# Altium PCB stop_sign.PcbDoc (part 2 of 2)
Units mm, origin at the board's own origin, x right, y up, seen from the top; angles counter-clockwise.
Board outline 187.78 x 187.78 mm, 2 copper layers (Top Layer, Bottom Layer); 123 components, 124 nets, 550 pads, 94 vias.
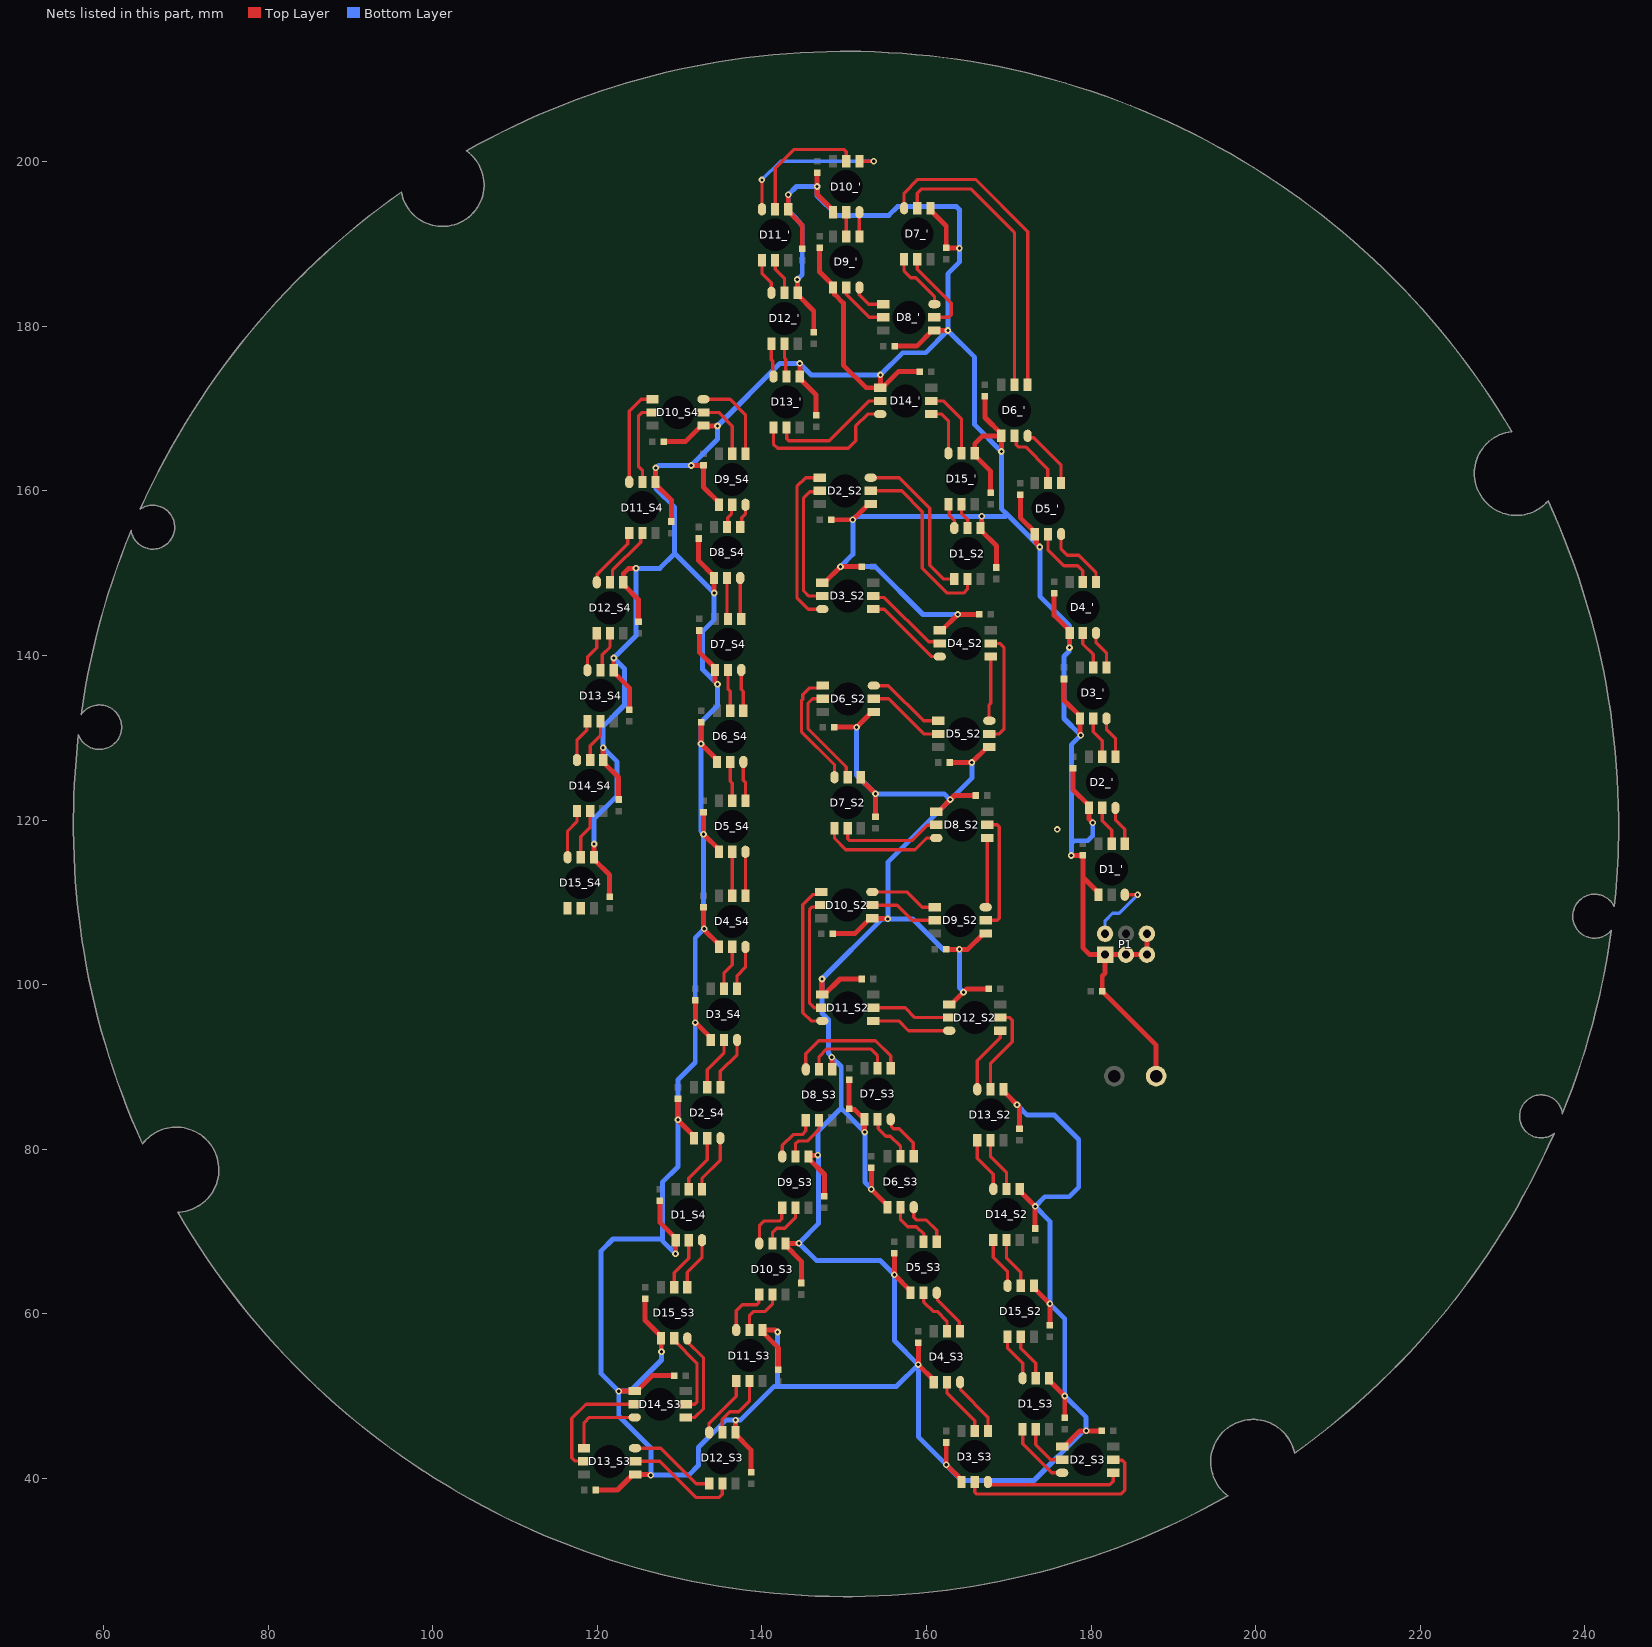
[diagram p2: the nets of this part, all layers, seen from the top]

## Via types
v1: diameter 0.8, hole 0.4, Top Layer to Bottom Layer, 94 vias

## Nets (pads, with @x,y where several pads share a name; then routed paths per layer and width w, separated by ;. In a path a pad name is that pad's centre, name@x,y a point inside that pad or via, vN(x,y) a via of type N, cw(c..) or ccw(c..) an arc to the next point about the centre after c; other vN are vias at no path point) (continued)
GND: C1_'.0 C1_S2.0 C1_S3.0 C1_S4.0 C2_'.0 C2_S2.0 C2_S3.0 C2_S4.0 C3_'.0 C3_S2.0 C3_S3.0 C3_S4.0 C4_'.0 C4_S2.0 C4_S3.0 C4_S4.0 C5_'.0 C5_S2.0 C5_S3.0 C5_S4.0 C6_'.0 C6_S2.0 C6_S3.0 C6_S4.0 C7_'.0 C7_S2.0 C7_S3.0 C7_S4.0 C8_'.0 C8_S2.0 C8_S3.0 C8_S4.0 C9_'.0 C9_S2.0 C9_S3.0 C9_S4.0 C10_'.0 C10_S2.0 C10_S3.0 C10_S4.0 C11_'.0 C11_S2.0 C11_S3.0 C11_S4.0 C12_'.0 C12_S2.0 C12_S3.0 C12_S4.0 C13_'.0 C13_S2.0 C13_S3.0 C13_S4.0 C14_'.0 C14_S2.0 C14_S3.0 C14_S4.0 C15_'.0 C15_S2.0 C15_S3.0 C15_S4.0 C16.0 D1_'.3 D1_S2.3 D1_S3.3 D1_S4.3 D2_'.3 D2_S2.3 D2_S3.3 D2_S4.3 D3_'.3 D3_S2.3 D3_S3.3 D3_S4.3 D4_'.3 D4_S2.3 D4_S3.3 D4_S4.3 D5_'.3 D5_S2.3 D5_S3.3 D5_S4.3 D6_'.3 D6_S2.3 D6_S3.3 D6_S4.3 D7_'.3 D7_S2.3 D7_S3.3 D7_S4.3 D8_'.3 D8_S2.3 D8_S3.3 D8_S4.3 D9_'.3 D9_S2.3 D9_S3.3 D9_S4.3 D10_'.3 D10_S2.3 D10_S3.3 D10_S4.3 D11_'.3 D11_S2.3 D11_S3.3 D11_S4.3 D12_'.3 D12_S2.3 D12_S3.3 D12_S4.3 D13_'.3 D13_S2.3 D13_S3.3 D13_S4.3 D14_'.3 D14_S2.3 D14_S3.3 D14_S4.3 D15_'.3 D15_S2.3 D15_S3.3 D15_S4.3 J1.1 P1.1 P1.2 P1.3 P1.4 | length 1125.2
  Top Layer w0.6: v1(119.6,117.1) 119.591,117.091 119.591,115.504 D15_S4.3@119.583,115.495 119.583,115.245 121.498,113.331 C13_S4.0@121.498,110.695 ; C11_S2.0@119.787,38.602 122.451,38.602 124.337,40.488 D13_S3.3@124.587,40.488 126.358,40.488 126.446,40.4 v1(126.5,40.4) ; v1(120.7,128.8) 120.713,128.787 120.713,127.319 D14_S4.3@120.726,127.306 120.726,127.056 122.598,125.185 C14_S4.0@122.598,122.506 ; v1(122,139.7) 121.998,139.698 121.998,138.23 D13_S4.3@121.996,138.228 121.996,137.978 123.898,136.077 C15_S4.0@123.898,133.428 ; v1(122.6,50.6) 122.611,50.611 124.524,50.611 D14_S3.3@124.535,50.622 124.785,50.622 126.66,52.497 C14_'.0@129.335,52.497 ; v1(124.7,150.6) 124.662,150.562 123.762,150.562 123.2,150 123.2,148.957 D12_S4.3@123.139,148.896 123.139,148.646 124.997,146.788 C2_S3.0@124.997,144.096 ; C13_S3.0@125.8,61.823 125.8,59.21 127.737,57.273 D15_S3.3@127.737,57.023 127.769,56.992 127.769,55.431 v1(127.8,55.4) ; v1(127.1,162.8) 127.088,162.788 127.088,161.1 D11_S4.3@127.076,161.088 127.076,160.838 128.998,158.917 C3_S3.0@128.998,156.288 ; C12_S3.0@127.602,73.761 127.602,71.124 129.515,69.211 D1_S4.3@129.515,68.961 129.508,68.953 129.508,67.308 v1(129.5,67.3) ; C4_S3.0@128.094,166.002 130.702,166.002 132.639,167.94 132.639,167.945 D10_S4.3@132.894,167.945 132.917,167.923 134.577,167.923 v1(134.6,167.9) ; C11_S3.0@129.802,86.155 129.802,83.552 131.75,81.605 D2_S4.3@131.75,81.355 D2_S4.3@131.775,81.33 ; v1(131.4,163.1) 131.408,163.108 132.894,163.108 C13_S2.0@132.902,163.117 132.902,160.462 134.798,158.567 D9_S4.3@134.798,158.317 D9_S4.3@134.798,157.861 ; C10_S3.0@131.902,98.093 131.902,95.422 133.782,93.543 D3_S4.3@133.782,93.293 ; C5_S3.0@132.302,154.227 132.302,151.537 134.163,149.677 D8_S4.3@134.163,149.427 134.182,149.408 134.182,147.618 v1(134.2,147.6) ; C6_S3.0@132.402,143.051 132.402,140.388 134.29,138.501 D7_S4.3@134.29,138.251 134.29,136.864 134.6,136.554 v1(134.6,136.5) ; C7_S3.0@132.602,131.875 132.602,129.266 134.544,127.325 D6_S4.3@134.544,127.075 ; C9_S3.0@132.903,109.396 132.903,106.741 134.798,104.846 D4_S4.3@134.798,104.596 D4_S4.3@134.799,104.595 ; v1@132.902,118.298 134.798,116.403 D5_S4.3@134.798,116.153 ; v1@132.902,118.3 C8_S3.0@132.902,120.953 ; v1(136.8,47.1) D12_S3.3@136.8,45.6 136.8,45.35 138.698,43.452 C15_S3.0@138.698,40.77 ; v1(141.9,57.8) 141.846,57.8 141.607,58.039 D11_S3.3@140.081,58.039 140.081,57.789 141.998,55.872 C14_S3.0@141.998,53.239 ; v1(143.2,196) 143.202,195.997 143.202,194.238 D11_'.3@143.205,194.235 143.205,193.985 144.898,192.293 C3_S4.0@144.898,189.435 ; v1(144.3,185.7) 144.324,185.676 144.324,184.099 D12_'.3@144.348,184.075 144.348,183.825 146.298,181.876 C4_S4.0@146.298,179.275 ; v1(144.5,68.6) 144.478,68.578 142.897,68.578 D10_S3.3@142.875,68.557 142.875,68.307 144.798,66.384 C12_'.0@144.798,63.757 ; v1(144.6,175.5) 144.601,175.499 144.601,173.916 D13_'.3@144.602,173.915 144.602,173.665 146.597,171.67 C10_S2.0@146.597,169.2 ; v1(146.7,197) v1@146.702,196.998 ; C12_S2.0@146.702,198.677 v1@146.702,196.998 ; v1(146.8,79.3) 146.762,79.262 145.81,79.262 D9_S3.3@145.669,79.121 145.669,78.871 147.598,76.942 C13_'.0@147.598,74.321 ; D3_S2.3@146.964,148.844 D3_S2.3@147.343,148.844 147.593,148.844 v1(149.547,150.798) C6_'.0@152.143,150.798 ; C2_S4.0@147.002,189.533 147.002,186.621 148.641,184.983 D9_'.3@148.641,184.733 148.641,184.483 148.841,184.283 148.841,183.893 149.9,182.834 149.9,175.3 152.658,172.542 D14_'.3@154.38,172.542 ; v1(147.3,100.7) 147.322,100.678 147.322,98.828 D11_S2.3@147.343,98.806 147.593,98.806 149.485,100.698 C9_'.0@152.143,100.698 ; C14_S2.0@148.414,156.502 v1(151.047,156.502) 152.964,158.42 D2_S2.3@153.214,158.42 ; v1(148.5,91.2) 148.519,91.181 148.519,89.734 D8_S3.3@148.539,89.714 ; C8_S2.0@148.616,106.203 151.292,106.203 153.166,108.077 D10_S2.3@153.416,108.077 153.455,108.038 155.262,108.038 v1(155.3,108) ; D10_'.3@148.641,193.877 148.641,194.127 146.738,196.03 ; C7_'.0@148.795,131.302 v1(151.501,131.302) 153.345,133.147 D6_S2.3@153.595,133.147 ; C15_'.0@150.598,84.914 150.698,84.814 151.278,84.814 152.001,84.091 152.251,84.091 152.451,83.891 D7_S3.3@152.451,83.641 152.476,83.616 152.476,82.124 v1(152.5,82.1) ; C10_'.0@150.602,88.441 150.602,85.009 C15_'.0@150.698,84.914 ; D7_S2.3@152.019,125.222 152.019,124.972 v1(153.798,123.194) C7_S2.0@153.798,120.422 ; C11_'.0@153.302,77.773 v1(153.302,75.165) 155.245,73.223 D6_S3.3@155.245,72.973 ; v1(154.4,174.1) 154.39,174.09 154.39,172.552 D14_'.3@154.38,172.542 ; C2_S2.0@156.102,67.359 v1(156.102,64.745) 158.039,62.809 D5_S3.3@158.039,62.559 ; C5_S4.0@156.161,177.602 158.812,177.602 160.711,179.502 D8_'.3@160.961,179.502 160.962,179.501 v1@162.599,179.501 ; C3_'.0@159.002,56.512 v1(159.002,53.844) 160.884,51.962 D4_S3.3@160.884,51.712 D4_S3.3@160.884,51.689 ; C6_S4.0@159.18,174.497 156.585,174.497 154.63,172.542 D14_'.3@154.38,172.542 ; D7_'.3@160.477,194.362 160.477,194.107 160.482,194.107 162.398,192.192 C1_S4.0@162.398,189.562 162.429,189.531 163.969,189.531 v1(164,189.5) ; D8_S2.3@161.186,121.031 161.436,121.031 163.403,122.998 C4_S2.0@165.986,122.998 ; D4_S2.3@161.619,143.078 161.869,143.078 v1(163.788,144.998) C6_S2.0@166.419,144.998 ; C3_S2.0@162.384,104.302 165.014,104.302 166.934,106.223 D9_S2.3@167.184,106.223 167.208,106.223 D9_S2.3@167.408,106.423 ; C2_'.0@162.402,44.372 v1(162.402,41.681) 164.262,39.822 D3_S3.3@164.262,39.572 ; D12_S2.3@162.509,97.612 D12_S2.3@162.762,97.612 163.012,97.612 164.897,99.498 C5_'.0@167.562,99.498 ; C5_S2.0@162.84,127.002 v1(165.512,127.002) 167.39,128.88 D5_S2.3@167.64,128.88 ; v1(166.698,156.916) 166.659,156.877 166.659,155.586 D1_S2.3@166.573,155.5 166.573,155.25 168.498,153.326 C9_S2.0@168.498,150.7 ; C7_S4.0@167.102,171.5 167.102,168.934 169.088,166.949 D6_'.3@169.088,166.699 ; C7_S4.0@167.102,171.5 C7_S4.0@167.202,171.601 ; C8_'.0@167.798,159.792 167.798,162.406 165.862,164.342 D15_'.3@165.862,164.592 165.862,165.735 166.826,166.699 D6_'.3@169.088,166.699 ; v1(169.1,164.8) 169.094,164.806 169.094,166.693 D6_'.3@169.088,166.699 ; D13_S2.3@169.367,87.376 D13_S2.3@169.367,87.301 169.367,87.051 171.298,85.121 C1_S3.0@171.298,82.501 ; D14_S2.3@171.323,75.184 171.323,74.934 v1(173.198,73.059) C1_S2.0@173.198,70.384 ; C8_S4.0@171.402,159.561 171.402,156.76 173.152,155.011 D5_'.3@173.152,154.761 173.352,154.561 173.352,153.651 173.752,153.251 v1(173.752,153.197) ; D15_S2.3@173.05,63.425 173.05,63.175 v1(174.998,61.228) C4_'.0@174.998,58.625 ; D1_S3.3@174.879,52.197 174.879,51.947 v1(176.798,50.028) C1_'.0@176.798,47.397 ; C9_S4.0@175.502,147.548 175.502,144.89 177.394,142.998 D4_'.3@177.394,142.748 177.384,142.738 177.384,140.984 v1(177.375,140.975) ; D2_S3.3@176.454,43.891 D2_S3.3@176.478,43.891 176.728,43.891 178.634,45.798 C16.0@181.278,45.798 ; C10_S4.0@176.702,137.157 176.702,134.569 178.664,132.607 D3_'.3@178.664,132.357 178.664,130.447 178.756,130.354 v1(178.756,130.3) ; v1(177.6,115.7) 177.623,115.723 178.979,115.723 C12_S4.0@179.002,115.746 ; C11_S4.0@177.802,126.287 177.802,123.69 179.756,121.737 D2_'.3@179.756,121.487 179.756,120.144 v1(180.2,119.7) ; C12_S4.0@179.002,115.7 179.002,113.092 ; D1_'.3@180.861,111.158 180.899,111.196 179.002,113.092 ; P1.4@186.78,106.2 P1.3@186.78,103.66 P1.2@184.24,103.66 P1.1@181.7,103.66 ; J1.1@187.9,88.9 187.9,92.662 C15_S2.0@181.359,99.202 181.359,101.059 181.7,101.4 P1.1@181.7,103.66 ; v1@146.702,196.998 146.738,196.962 146.738,196.03 ; v1@146.702,196.998 146.702,196.065 146.738,196.03 ; v1@162.599,179.501 v1(162.6,179.5) ; 179.002,113.092 179.002,104.498 179.84,103.66 P1.1@181.7,103.66
  Bottom Layer w0.6: v1(119.6,117.1) 119.6,120.169 122.4,122.969 122.4,127.1 v1(120.7,128.8) 120.7,131.395 123.3,133.995 123.3,138.4 v1(122,139.7) 124.7,142.4 v1(124.7,150.6) 127.6,150.6 129.4,152.4 ; 127.7,69.1 121.9,69.1 120.457,67.657 120.457,52.743 v1(122.6,50.6) ; v1(127.8,55.4) 127.8,54.4 124.038,50.638 122.638,50.638 v1(122.6,50.6) ; v1(129.5,67.3) 127.9,68.9 127.9,75.994 129.8,77.894 v1(129.8,83.6) 129.8,88.45 131.9,90.55 v1(131.9,95.4) 131.9,105.7 v1(133,106.8) 133,106.854 132.9,106.954 v1(132.9,118.3) 132.9,118.354 132.6,118.654 v1(132.6,129.3) 132.6,131.9 134.6,133.9 v1(134.6,136.5) 132.8,138.3 132.8,142.951 134.2,144.351 v1(134.2,147.6) 129.4,152.4 ; v1(141.9,57.8) 141.9,51.2 ; v1@143.2,195.946 143.2,194.288 143.2,193.99 cw(c139.93,189.431) 143.921,193.375 cw(c137.494,187.025) 144.782,192.363 cw(c144.298,192.01) 144.785,192.359 144.897,192.203 144.898,192.01 144.898,186.297 v1(144.3,185.7) ; v1(143.2,196) 144.2,197 v1(146.7,197) 146.7,195.9 149.1,193.5 155.429,193.5 156.48,194.551 163.649,194.551 164,194.2 v1(164,189.5) 164,187.8 162.6,186.4 v1(162.6,179.5) ; v1(151.501,131.302) 151.501,125.49 v1(153.798,123.194) 162.152,123.194 162.846,122.5 v1(162.9,122.5) ; v1(153.302,75.165) 153.302,75.22 152.5,76.022 v1(152.5,82.1) 149.74,84.86 149.639,84.86 ; v1@162.402,41.636 164.284,39.754 173.054,39.754 179.062,45.762 179.362,45.762 v1(179.4,45.8) 179.4,47.426 v1(176.798,50.028) 176.798,59.428 v1(174.998,61.228) 174.998,71.259 v1(173.198,73.059) 174.373,74.235 177.335,74.235 178.5,75.4 178.5,81.2 175.55,84.15 172.25,84.15 v1(171,85.4) ; v1(162.402,41.681) 159.002,45.081 v1(159.002,53.844) ; v1(163.788,144.998) 159.568,144.998 153.767,150.798 v1(149.547,150.798) 151.047,152.297 v1(151.047,156.502) 151.085,156.502 151.498,156.916 v1@166.643,156.916 ; v1(164.5,99.1) 164.5,99.154 164,99.654 v1(164,104.3) 162,104.3 158.3,108 v1(155.3,108) ; v1(165.512,127.002) 165.512,125.112 v1(162.9,122.5) ; v1@166.79,156.916 169.581,156.916 169.69,157.025 169.925,157.025 ; v1(177.6,115.7) 177.6,117.149 ; v1(180.2,119.7) 180.2,118.1 179.6,117.5 177.951,117.5 177.6,117.149 ; v1(122.6,50.6) 122.6,47.6 126.5,43.7 v1(126.5,40.4) 131.1,40.4 132.3,41.6 132.3,43.8 135.6,47.1 v1(136.8,47.1) 136.819,47.119 137.419,47.119 141.5,51.2 141.9,51.2 ; 129.4,152.4 129.4,158.003 127.1,160.303 v1(127.1,162.8) 127.154,162.8 127.454,163.1 v1(131.4,163.1) 134.6,166.3 v1(134.6,167.9) 142.2,175.5 v1(144.6,175.5) 146,174.1 v1(154.4,174.1) 157.1,176.8 159.9,176.8 v1(162.6,179.5) ; 141.9,51.2 156.359,51.2 v1(159.002,53.844) ; 149.639,84.86 149.493,84.86 146.8,82.167 146.8,79.246 146.9,79.146 146.9,71 v1(144.5,68.6) 146.6,66.5 154.348,66.5 v1(156.102,64.745) 156.102,56.744 v1(159.002,53.844) ; 149.639,84.86 149.639,90.061 v1(148.5,91.2) 148.5,91.251 148.1,91.651 148.1,95.75 147.3,96.55 v1(147.3,100.7) 154.562,107.962 155.262,107.962 v1(155.3,108) ; v1(155.3,108) 155.3,114.9 v1(162.9,122.5) ; v1(162.6,179.5) 165.85,176.25 165.85,168.05 v1(169.1,164.8) 169.1,157.849 169.925,157.025 ; 169.925,157.025 v1(173.752,153.197) 173.8,153.149 173.775,153.124 173.775,147.225 177.375,143.625 v1(177.375,140.975) 177.375,140.92 177.3,140.846 177.3,140.5 176.7,139.9 176.7,132.356 v1(178.756,130.3) 177.6,129.144 177.6,117.149
  other v1: 175.877,118.877
NetD1_'_5: D1_'.5 D2_'.2 | length 4.8
  Top Layer w0.4: D2_'.2@181.356,121.487 181.356,119.944 182.499,118.801 D1_'.5@182.499,117.146
NetD1_'_6: D1_'.6 D2_'.1 | length 4.8
  Top Layer w0.4: D2_'.1@182.956,121.487 182.956,120.044 184.099,118.901 D1_'.6@184.099,117.146
NetD1_S2_1: D1_S2.1 D15_'.6 | length 3.2
  Top Layer w0.4: D15_'.6@162.662,158.392 162.758,158.296 162.758,157.042 163.4,156.4 163.4,155.527 D1_S2.1@163.373,155.5
NetD1_S2_2: D1_S2.2 D15_'.5 | length 3.6
  Top Layer w0.4: D15_'.5@164.562,158.092 D15_'.5@164.262,158.392 164.262,157.238 165,156.5 165,155.527 D1_S2.2@164.973,155.5
NetD1_S2_5: D1_S2.5 D2_S2.2 | length 23.1
  Top Layer w0.4: D2_S2.2@153.806,159.72 153.514,159.72 D2_S2.2@153.214,160.02 156.98,160.02 159.5,157.5 159.5,150.6 162.5,147.6 164.5,147.6 164.973,148.073 D1_S2.5@164.973,149.3
NetD1_S2_6: D1_S2.6 D2_S2.1 | length 19.6
  Top Layer w0.4: D2_S2.1@153.214,161.62 156.68,161.62 160.4,157.9 160.4,151 162.1,149.3 D1_S2.6@163.373,149.3 D1_S2.6@163.373,149.55
NetD1_S3_1: D1_S3.1 D15_S2.6 | length 5.8
  Top Layer w0.4: D15_S2.6@169.85,57.225 169.85,55.828 171.679,53.999 D1_S3.1@171.679,52.197
NetD1_S3_2: D1_S3.2 D15_S2.5 | length 5.8
  Top Layer w0.4: D15_S2.5@171.45,57.225 171.45,55.84 173.279,54.011 D1_S3.2@173.279,52.197
NetD1_S3_5: D1_S3.5 D2_S3.2 | length 6.3
  Top Layer w0.4: D1_S3.5@173.279,45.997 173.279,44.121 175.109,42.291 D2_S3.2@176.478,42.291 D2_S3.2@176.178,42.591
NetD1_S3_6: D1_S3.6 D2_S3.1 | length 8
  Top Layer w0.4: D1_S3.6@171.679,45.997 171.679,44.221 175.209,40.691 D2_S3.1@176.478,40.691
NetD1_S4_1: D1_S4.1 D15_S3.6 | length 6.5
  Top Layer w0.4: D15_S3.6@130.937,63.223 130.937,65.037 132.715,66.815 D1_S4.1@132.715,68.961
NetD1_S4_2: D1_S4.2 D15_S3.5 | length 6.5
  Top Layer w0.4: D15_S3.5@129.337,63.223 129.337,64.99 131.115,66.768 D1_S4.2@131.115,68.961
NetD1_S4_5: D1_S4.5 D2_S4.2 | length 7.1
  Top Layer w0.4: D1_S4.5@131.115,75.161 131.115,76.505 133.35,78.74 D2_S4.2@133.35,81.355
NetD1_S4_6: D1_S4.6 D2_S4.1 | length 7.1
  Top Layer w0.4: D1_S4.6@132.715,75.161 132.715,76.454 134.95,78.689 D2_S4.1@134.95,81.355
NetD2_'_5: D2_'.5 D3_'.2 | length 5.1
  Top Layer w0.4: D3_'.2@180.264,132.357 180.264,130.736 181.356,129.644 D2_'.5@181.356,127.687
NetD2_'_6: D2_'.6 D3_'.1 | length 5.1
  Top Layer w0.4: D3_'.1@181.864,132.357 181.864,131.036 182.956,129.944 D2_'.6@182.956,127.687
NetD2_S2_5: D2_S2.5 D3_S2.2 | length 16.4
  Top Layer w0.4: D2_S2.5@146.764,160.02 D2_S2.5@147.014,160.02 146.894,159.9 145.8,159.9 145.054,159.154 145.054,147.846 145.656,147.244 D3_S2.2@147.343,147.244
NetD2_S2_6: D2_S2.6 D3_S2.1 | length 21.3
  Top Layer w0.4: D2_S2.6@146.422,161.32 146.714,161.32 D2_S2.6@147.014,161.62 145.32,161.62 144.254,160.554 144.254,147.046 145.656,145.644 D3_S2.1@147.343,145.644 D3_S2.1@147.228,145.759
NetD2_S3_5: D2_S3.5 D3_S3.2 | length 24.6
  Top Layer w0.4: D3_S3.2@165.862,39.572 165.862,38.348 166.096,38.114 183.614,38.114 184.1,38.6 184.1,41.9 183.794,42.206 182.763,42.206 D2_S3.5@182.678,42.291
NetD2_S3_6: D2_S3.6 D3_S3.1 | length 16.6
  Top Layer w0.4: D3_S3.1@167.462,39.572 167.462,39.52 167.739,39.243 182.243,39.243 182.678,39.678 D2_S3.6@182.678,40.691
NetD2_S4_5: D2_S4.5 D3_S4.2 | length 6.6
  Top Layer w0.4: D2_S4.5@133.35,87.555 133.35,89.662 135.382,91.694 D3_S4.2@135.382,93.293
NetD2_S4_6: D2_S4.6 D3_S4.1 | length 6.6
  Top Layer w0.4: D2_S4.6@134.95,87.555 134.95,89.484 136.982,91.516 D3_S4.1@136.982,93.293
NetD3_'_5: D3_'.5 D4_'.2 | length 4.7
  Top Layer w0.4: D4_'.2@178.994,142.748 178.994,141.406 180.264,140.136 D3_'.5@180.264,138.557
NetD3_'_6: D3_'.6 D4_'.1 | length 4.7
  Top Layer w0.4: D4_'.1@180.594,142.748 180.594,141.606 181.864,140.336 D3_'.6@181.864,138.557
NetD3_S2_5: D3_S2.5 D4_S2.2 | length 10.5
  Top Layer w0.4: D3_S2.5@153.543,147.244 153.738,147.049 154.893,147.049 160.269,141.673 161.424,141.673 D4_S2.2@161.619,141.478
NetD3_S2_6: D3_S2.6 D4_S2.1 | length 10.5
  Top Layer w0.4: D3_S2.6@153.543,145.644 154.856,145.644 160.618,139.882 161.615,139.882 D4_S2.1@161.619,139.878
NetD3_S3_5: D3_S3.5 D4_S3.2 | length 7.3
  Top Layer w0.4: D4_S3.2@162.484,51.712 162.484,50.416 165.862,47.038 D3_S3.5@165.862,45.772
NetD3_S3_6: D3_S3.6 D4_S3.1 | length 7.3
  Top Layer w0.4: D4_S3.1@164.084,51.712 164.139,51.657 164.139,50.761 167.462,47.438 D3_S3.6@167.462,45.772
NetD3_S4_5: D3_S4.5 D4_S4.2 | length 5.5
  Top Layer w0.4: D3_S4.5@135.382,99.493 135.382,101.386 136.398,102.402 D4_S4.2@136.398,104.596
NetD3_S4_6: D3_S4.6 D4_S4.1 | length 5.5
  Top Layer w0.4: D3_S4.6@136.982,99.493 136.982,101.082 137.998,102.098 D4_S4.1@137.998,104.596
NetD4_'_5: D4_'.5 D5_'.2 | length 8.6
  Top Layer w0.4: D5_'.2@174.752,154.761 174.752,152.848 176.7,150.9 178.4,150.9 178.994,150.306 D4_'.5@178.994,148.948 D4_'.5@178.936,149.006
NetD4_'_6: D4_'.6 D5_'.1 | length 9
  Top Layer w0.4: D5_'.1@176.467,154.233 176.467,154.646 D5_'.1@176.352,154.761 176.352,152.948 177.1,152.2 178.5,152.2 180.594,150.106 D4_'.6@180.594,148.948
NetD4_S2_5: D4_S2.5 D5_S2.2 | length 13.7
  Top Layer w0.4: D5_S2.2@167.64,130.48 168.827,130.48 169.404,131.057 169.404,140.99 168.916,141.478 D4_S2.5@167.819,141.478
NetD4_S2_6: D4_S2.6 D5_S2.1 | length 8.2
  Top Layer w0.4: D5_S2.1@167.819,132.259 D5_S2.1@167.64,132.08 167.6,132.12 167.6,134 167.819,134.219 D4_S2.6@167.819,139.878
NetD4_S3_5: D4_S3.5 D5_S3.2 | length 6.5
  Top Layer w0.4: D5_S3.2@159.639,62.559 159.657,62.541 159.657,61.443 160.8,60.3 161.3,60.3 162.484,59.116 D4_S3.5@162.484,57.912 D4_S3.5@162.184,58.212
NetD4_S3_6: D4_S3.6 D5_S3.1 | length 5.8
  Top Layer w0.4: D5_S3.1@161.239,62.559 161.343,62.455 161.343,61.657 163.972,59.028 163.972,58.024 D4_S3.6@164.084,57.912
NetD4_S4_5: D4_S4.5 D5_S4.2 | length 5.4
  Top Layer w0.4: D4_S4.5@136.398,110.796 D5_S4.2@136.398,116.153
NetD4_S4_6: D4_S4.6 D5_S4.1 | length 5.4
  Top Layer w0.4: D4_S4.6@137.998,110.796 D5_S4.1@137.998,116.153
NetD5_'_5: D5_'.5 D6_'.2 | length 7.9
  Top Layer w0.4: D6_'.2@170.688,166.699 170.894,166.493 170.894,165.606 171.151,165.349 172.038,165.349 174.723,162.664 174.723,160.99 D5_'.5@174.752,160.961
NetD5_'_6: D5_'.6 D6_'.1 | length 7.7
  Top Layer w0.4: D6_'.1@172.288,166.699 172.534,166.453 173.047,166.453 176.352,163.148 D5_'.6@176.352,160.961
NetD5_S2_5: D5_S2.5 D6_S2.2 | length 9.6
  Top Layer w0.4: D6_S2.2@153.595,134.747 155.384,134.747 159.651,130.48 D5_S2.5@161.44,130.48
NetD5_S2_6: D5_S2.6 D6_S2.1 | length 9.6
  Top Layer w0.4: D6_S2.1@153.595,136.347 155.373,136.347 159.64,132.08 D5_S2.6@161.44,132.08
NetD5_S3_5: D5_S3.5 D6_S3.2 | length 6.5
  Top Layer w0.4: D6_S3.2@157.145,72.673 D6_S3.2@156.845,72.973 156.845,71.455 157.7,70.6 158.766,70.6 159.7,69.666 159.7,68.82 D5_S3.5@159.639,68.759
NetD5_S3_6: D5_S3.6 D6_S3.1 | length 6.1
  Top Layer w0.4: D6_S3.1@158.445,72.973 158.445,71.755 158.8,71.4 160,71.4 161.239,70.161 D5_S3.6@161.239,68.759
NetD5_S4_5: D5_S4.5 D6_S4.2 | length 5.2
  Top Layer w0.4: D5_S4.5@136.144,122.607 D5_S4.5@136.398,122.353 136.398,124.502 136.144,124.756 D6_S4.2@136.144,127.075
NetD5_S4_6: D5_S4.6 D6_S4.1 | length 5.2
  Top Layer w0.4: D5_S4.6@137.744,122.607 D5_S4.6@137.998,122.353 137.998,124.602 137.744,124.856 D6_S4.1@137.744,127.075
NetD6_'_5: D6_'.5 D7_'.2 | length 34.5
  Top Layer w0.4: D7_'.2@158.877,194.362 158.877,196.177 159.4,196.7 165.4,196.7 170.688,191.412 D6_'.5@170.688,172.899
NetD6_'_6: D6_'.6 D7_'.1 | length 38.8
  Top Layer w0.4: D7_'.1@157.277,194.362 157.277,196.185 158.946,197.854 165.954,197.854 172.288,191.52 D6_'.6@172.288,172.899
NetD6_S2_5: D6_S2.5 D7_S2.2 | length 13
  Top Layer w0.4: D6_S2.5@147.395,134.747 146.147,134.747 145.6,134.2 145.6,131.1 150.241,126.459 150.241,125.4 D7_S2.2@150.419,125.222
NetD6_S2_6: D6_S2.6 D7_S2.1 | length 14.7
  Top Layer w0.4: D6_S2.6@147.395,136.347 147.095,136.047 145.747,136.047 144.946,135.246 144.946,134.677 144.8,134.531 144.8,130.769 148.819,126.75 D7_S2.1@148.819,125.222
NetD6_S3_5: D6_S3.5 D7_S3.2 | length 5.9
  Top Layer w0.4: D7_S3.2@154.051,83.641 154.147,83.544 154.147,82.525 155.073,81.6 155.6,81.6 156.845,80.355 D6_S3.5@156.845,79.173
NetD6_S3_6: D6_S3.6 D7_S3.1 | length 6
  Top Layer w0.4: D7_S3.1@155.651,83.641 155.75,83.542 155.75,82.734 155.984,82.5 156.7,82.5 158.4,80.8 158.4,79.218 D6_S3.6@158.445,79.173
NetD6_S4_5: D6_S4.5 D7_S4.2 | length 5.1
  Top Layer w0.4: D7_S4.2@135.89,138.251 135.89,135.89 136.144,135.636 D6_S4.5@136.144,133.275
NetD6_S4_6: D6_S4.6 D7_S4.1 | length 5.1
  Top Layer w0.4: D7_S4.1@137.49,138.251 137.49,135.89 137.744,135.636 D6_S4.6@137.744,133.275
NetD7_'_5: D7_'.5 D8_'.2 | length 10.6
  Top Layer w0.4: D7_'.5@158.877,188.162 158.877,186.923 163,182.8 163,181.4 162.7,181.1 160.963,181.1 D8_'.2@160.961,181.102
NetD7_'_6: D7_'.6 D8_'.1 | length 7.6
  Top Layer w0.4: D7_'.6@157.354,188.085 D7_'.6@157.277,188.162 157.277,186.723 158.1,185.9 158.7,185.9 160.961,183.639 D8_'.1@160.961,182.702 D8_'.1@160.832,182.831
NetD7_S2_5: D7_S2.5 D8_S2.2 | length 12.9
  Top Layer w0.4: D7_S2.5@150.419,119.022 150.419,117.753 150.653,117.519 158.219,117.519 160.07,119.37 161.125,119.37 D8_S2.2@161.186,119.431
NetD7_S2_6: D7_S2.6 D8_S2.1 | length 14.8
  Top Layer w0.4: D7_S2.6@148.819,119.022 148.819,117.781 150.2,116.4 158.6,116.4 160.031,117.831 D8_S2.1@161.186,117.831
NetD7_S3_5: D7_S3.5 D8_S3.2 | length 10.9
  Top Layer w0.4: D8_S3.2@146.939,89.714 146.939,91.239 147.9,92.2 153.2,92.2 154.051,91.349 D7_S3.5@154.051,89.841
NetD7_S3_6: D7_S3.6 D8_S3.1 | length 15.2
  Top Layer w0.4: D8_S3.1@145.339,89.714 145.339,91.639 146.9,93.2 153.8,93.2 155.651,91.349 D7_S3.6@155.651,89.841
NetD7_S4_5: D7_S4.5 D8_S4.2 | length 5
  Top Layer w0.4: D8_S4.2@135.763,149.427 135.763,144.653 135.89,144.526 D7_S4.5@135.89,144.451
NetD7_S4_6: D7_S4.6 D8_S4.1 | length 5
  Top Layer w0.4: D8_S4.1@137.363,149.427 137.363,144.578 D7_S4.6@137.49,144.451
NetD8_'_5: D8_'.5 D9_'.2 | length 6.5
  Top Layer w0.4: D9_'.2@150.241,184.733 150.241,183.896 153.035,181.102 D8_'.5@154.761,181.102
NetD8_'_6: D8_'.6 D9_'.1 | length 4.3
  Top Layer w0.4: D9_'.1@151.841,184.733 151.841,183.82 152.959,182.702 D8_'.6@154.761,182.702
NetD8_S2_5: D8_S2.5 D9_S2.2 | length 14.5
  Top Layer w0.4: D9_S2.2@167.184,107.823 168.612,107.823 168.846,108.057 168.846,119.197 168.612,119.431 D8_S2.5@167.386,119.431
NetD8_S2_6: D8_S2.6 D9_S2.1 | length 8.5
  Top Layer w0.4: D9_S2.1@167.184,109.423 167.386,109.625 D8_S2.6@167.386,117.831
NetD8_S3_5: D8_S3.5 D9_S3.2 | length 6.2
  Top Layer w0.4: D9_S3.2@144.069,79.121 144.069,80.669 144.4,81 145.5,81 146.939,82.439 D8_S3.5@146.939,83.514
NetD8_S3_6: D8_S3.6 D9_S3.1 | length 6.2
  Top Layer w0.4: D9_S3.1@142.469,79.121 142.469,80.469 143.8,81.8 144.9,81.8 145.339,82.239 D8_S3.6@145.339,83.514
NetD8_S4_5: D8_S4.5 D9_S4.2 | length 3
  Top Layer w0.4: D8_S4.5@135.763,155.627 135.843,155.707 135.843,156.743 136.301,157.201 136.301,158.22 D9_S4.2@136.398,158.317
NetD8_S4_6: D8_S4.6 D9_S4.1 | length 3
  Top Layer w0.4: D8_S4.6@137.363,155.627 137.543,155.807 137.543,156.743 137.998,157.198 D9_S4.1@137.998,158.317
NetD9_'_5: D9_'.5 D10_'.2 | length 2.9
  Top Layer w0.4: D9_'.5@150.241,190.933 D10_'.2@150.241,193.877
NetD9_'_6: D9_'.6 D10_'.1 | length 2.9
  Top Layer w0.4: D9_'.6@151.841,190.933 D10_'.1@151.841,193.877
NetD9_S2_5: D9_S2.5 D10_S2.2 | length 8.3
  Top Layer w0.4: D10_S2.2@153.416,109.677 156.423,109.677 158.277,107.823 D9_S2.5@160.984,107.823
NetD9_S2_6: D9_S2.6 D10_S2.1 | length 8.3
  Top Layer w0.4: D10_S2.1@153.416,111.277 157.623,111.277 159.477,109.423 D9_S2.6@160.984,109.423
NetD9_S3_5: D9_S3.5 D10_S3.2 | length 6.1
  Top Layer w0.4: D10_S3.2@141.275,68.557 141.275,69.875 141.8,70.4 142.8,70.4 144.069,71.669 D9_S3.5@144.069,72.921
NetD9_S3_6: D9_S3.6 D10_S3.1 | length 6.9
  Top Layer w0.4: D10_S3.1@139.675,68.557 139.7,68.582 139.7,70.7 140.3,71.3 142.166,71.3 142.4,71.534 142.4,72.852 D9_S3.6@142.469,72.921 D9_S3.6@142.469,72.671
NetD9_S4_5: D9_S4.5 D10_S4.2 | length 7.6
  Top Layer w0.4: D10_S4.2@132.894,169.545 134.747,169.545 136.398,167.894 D9_S4.5@136.398,164.517
NetD9_S4_6: D9_S4.6 D10_S4.1 | length 10.6
  Top Layer w0.4: D10_S4.1@132.894,171.145 136.132,171.145 137.998,169.279 D9_S4.6@137.998,164.517
NetD10_'_5: D10_'.5 D11_'.2 | length 15.8
  Top Layer w0.4: D11_'.2@141.605,194.235 141.605,199.195 143.91,201.5 149.952,201.5 150.241,201.211 D10_'.5@150.241,200.077
NetD10_'_6: D10_'.6 D11_'.1 | length 20.1
  Top Layer w0.4: D11_'.1@140.005,194.235 v1@140.005,197.8 ; D10_'.6@152.058,200.294 D10_'.6@151.841,200.077 v1(153.577,200.077)
  Bottom Layer w0.4: v1(140,197.8) 142.277,200.077 v1(153.577,200.077)
NetD10_S2_5: D10_S2.5 D11_S2.2 | length 14.8
  Top Layer w0.4: D10_S2.5@147.216,109.677 146.991,109.452 146.142,109.452 145.778,109.087 145.778,97.796 146.368,97.206 D11_S2.2@147.343,97.206
NetD10_S2_6: D10_S2.6 D11_S2.1 | length 18.8
  Top Layer w0.4: D10_S2.6@147.216,111.277 146.916,110.977 146.241,110.977 144.978,109.714 144.978,96.621 145.993,95.606 D11_S2.1@147.343,95.606
NetD10_S3_5: D10_S3.5 D11_S3.2 | length 6.7
  Top Layer w0.4: D11_S3.2@138.781,58.339 D11_S3.2@138.481,58.039 138.481,59.781 139,60.3 140.4,60.3 141.275,61.175 D10_S3.5@141.275,62.357
NetD10_S3_6: D10_S3.6 D11_S3.1 | length 6.5
  Top Layer w0.4: D11_S3.1@136.881,58.039 136.881,60.381 137.6,61.1 139.366,61.1 139.6,61.334 139.6,62.282 D10_S3.6@139.675,62.357
NetD10_S4_5: D10_S4.5 D11_S4.2 | length 10.1
  Top Layer w0.4: D11_S4.2@125.476,161.088 125.476,162.524 125,163 125,169.1 125.445,169.545 D10_S4.5@126.694,169.545
NetD10_S4_6: D10_S4.6 D11_S4.1 | length 12
  Top Layer w0.4: D11_S4.1@123.876,161.088 123.876,169.676 125.345,171.145 D10_S4.6@126.694,171.145
NetD11_'_5: D11_'.5 D12_'.2 | length 4.4
  Top Layer w0.4: D11_'.5@141.605,188.035 141.605,186.92 142.748,185.777 D12_'.2@142.748,184.075
NetD11_'_6: D11_'.6 D12_'.1 | length 4.4
  Top Layer w0.4: D11_'.6@140.005,188.035 140.005,186.452 141.148,185.309 D12_'.1@141.148,184.075
NetD11_S2_5: D11_S2.5 D12_S2.2 | length 9.7
  Top Layer w0.4: D11_S2.5@153.543,97.206 157.405,97.206 158.599,96.012 D12_S2.2@162.762,96.012
NetD11_S2_6: D11_S2.6 D12_S2.1 | length 9.7
  Top Layer w0.4: D11_S2.6@153.543,95.606 156.616,95.606 157.81,94.412 D12_S2.1@162.762,94.412
NetD11_S3_5: D11_S3.5 D12_S3.2 | length 8.3
  Top Layer w0.4: D12_S3.2@135.2,45.6 135.179,45.621 135.179,47.179 136.1,48.1 137.2,48.1 138.481,49.381 D11_S3.5@138.481,51.839
NetD11_S3_6: D11_S3.6 D12_S3.1 | length 7.6
  Top Layer w0.4: D12_S3.1@133.6,45.6 133.579,45.621 133.579,46.711 136.881,50.013 D11_S3.6@136.881,51.839
NetD11_S4_5: D11_S4.5 D12_S4.2 | length 7.6
  Top Layer w0.4: D12_S4.2@121.539,148.896 121.839,149.196 121.839,150.339 125.283,153.783 125.283,154.695 D11_S4.5@125.476,154.888
NetD11_S4_6: D11_S4.6 D12_S4.1 | length 7.6
  Top Layer w0.4: D12_S4.1@119.939,148.896 120,148.957 120,149.9 123.7,153.6 123.7,154.712 D11_S4.6@123.876,154.888
NetD12_'_5: D12_'.5 D13_'.2 | length 4.1
  Top Layer w0.4: D12_'.5@142.748,177.875 142.748,176.152 142.9,176 142.9,174.017 D13_'.2@143.002,173.915
NetD12_'_6: D12_'.6 D13_'.1 | length 4.1
  Top Layer w0.4: D12_'.6@141.148,177.875 141.148,175.952 141.3,175.8 141.3,174.017 D13_'.1@141.402,173.915
NetD12_S2_5: D12_S2.5 D13_S2.2 | length 11.1
  Top Layer w0.4: D13_S2.2@167.767,87.301 167.767,90.403 170.434,93.07 170.434,95.676 170.098,96.012 D12_S2.5@168.962,96.012
NetD12_S2_6: D12_S2.6 D13_S2.1 | length 8.3
  Top Layer w0.4: D13_S2.1@166.167,87.301 166.167,90.767 168.946,93.546 168.946,94.396 D12_S2.6@168.962,94.412
NetD12_S3_5: D12_S3.5 D13_S3.2 | length 13.9
  Top Layer w0.4: D13_S3.2@124.587,42.088 127.591,42.088 131.979,37.7 134.8,37.7 135.179,38.079 135.179,39.379 D12_S3.5@135.2,39.4
NetD12_S3_6: D12_S3.6 D13_S3.1 | length 10.8
  Top Layer w0.4: D13_S3.1@124.587,43.688 127.712,43.688 132.03,39.37 133.57,39.37 D12_S3.6@133.6,39.4
NetD12_S4_5: D12_S4.5 D13_S4.2 | length 4.9
  Top Layer w0.4: D13_S4.2@120.396,138.228 120.593,138.425 120.593,140.088 121.539,141.034 D12_S4.5@121.539,142.696
NetD12_S4_6: D12_S4.6 D13_S4.1 | length 4.9
  Top Layer w0.4: D13_S4.1@118.796,138.228 118.796,139.796 119.939,140.939 D12_S4.6@119.939,142.696
NetD13_'_5: D13_'.5 D14_'.2 | length 14.9
  Top Layer w0.4: D13_'.5@143.002,167.715 143.002,166.334 143.236,166.1 148.2,166.1 153.042,170.942 D14_'.2@154.38,170.942
NetD13_'_6: D13_'.6 D14_'.1 | length 18
  Top Layer w0.4: D13_'.6@141.402,167.715 141.402,165.698 141.9,165.2 150.5,165.2 151.4,166.1 151.4,167.9 152.842,169.342 D14_'.1@154.38,169.342
NetD13_S2_5: D13_S2.5 D14_S2.2 | length 6.7
  Top Layer w0.4: D13_S2.5@167.767,81.101 167.767,79.133 169.723,77.177 D14_S2.2@169.723,75.184
NetD13_S2_6: D13_S2.6 D14_S2.1 | length 6.7
  Top Layer w0.4: D13_S2.6@166.167,81.101 166.167,78.933 168.123,76.977 D14_S2.1@168.123,75.184
NetD13_S3_5: D13_S3.5 D14_S3.2 | length 14.8
  Top Layer w0.4: D13_S3.5@118.387,42.088 118.346,42.129 117.271,42.129 116.9,42.5 116.9,47.3 118.622,49.022 D14_S3.2@124.535,49.022
NetD13_S3_6: D13_S3.6 D14_S3.1 | length 9.5
  Top Layer w0.4: D13_S3.6@118.387,43.688 118.387,46.787 119.022,47.422 D14_S3.1@124.535,47.422
NetD13_S4_5: D13_S4.5 D14_S4.2 | length 5.2
  Top Layer w0.4: D14_S4.2@119.126,127.306 119.126,129.032 120.396,130.302 D13_S4.5@120.396,132.028
NetD13_S4_6: D13_S4.6 D14_S4.1 | length 5.2
  Top Layer w0.4: D14_S4.1@117.526,127.306 117.526,129.726 118.712,130.912 118.712,131.944 D13_S4.6@118.796,132.028
NetD14_'_5: D14_'.5 D15_'.2 | length 8.7
  Top Layer w0.4: D14_'.5@160.58,170.942 162.058,170.942 164.262,168.738 D15_'.2@164.262,164.592
NetD14_'_6: D14_'.6 D15_'.1 | length 6.4
  Top Layer w0.4: D14_'.6@160.58,169.342 161.858,169.342 162.662,168.538 D15_'.1@162.662,164.592
NetD14_S2_5: D14_S2.5 D15_S2.2 | length 6.3
  Top Layer w0.4: D14_S2.5@169.723,68.984 169.723,66.777 171.45,65.05 D15_S2.2@171.45,63.425
NetD14_S2_6: D14_S2.6 D15_S2.1 | length 6.3
  Top Layer w0.4: D14_S2.6@168.123,68.984 168.123,66.877 169.85,65.15 D15_S2.1@169.85,63.425
NetD14_S3_5: D14_S3.5 D15_S3.2 | length 10.4
  Top Layer w0.4: D15_S3.2@129.337,57.023 129.337,56.773 132.1,54.01 132.1,49.256 131.866,49.022 D14_S3.5@130.735,49.022
NetD14_S3_6: D14_S3.6 D15_S3.1 | length 12
  Top Layer w0.4: D14_S3.6@130.735,47.422 131.846,47.422 132.9,48.476 132.9,54.683 130.937,56.646 D15_S3.1@130.937,57.023
NetD14_S4_5: D14_S4.5 D15_S4.2 | length 6.1
  Top Layer w0.4: D15_S4.2@117.983,115.495 117.983,118.006 119.126,119.149 D14_S4.5@119.126,121.106
NetD14_S4_6: D14_S4.6 D15_S4.1 | length 6.1
  Top Layer w0.4: D15_S4.1@116.383,115.495 116.383,118.683 117.526,119.826 D14_S4.6@117.526,121.106
NetD15_S4_5: D15_S4.5
NetD15_S4_6: D15_S4.6
SDI: D1_'.1 P1.6 | length 8.4
  Top Layer w0.4: D1_'.1@184.099,110.946 v1(185.646,110.946)
  Bottom Layer w0.4: P1.6@181.7,106.2 181.7,107.8 182.6,108.7 183.4,108.7 v1(185.646,110.946)
pads on no net: D1_'.nc D1_S2.nc D1_S3.nc D1_S4.nc D2_'.nc D2_S2.nc D2_S3.nc D2_S4.nc D3_'.nc D3_S2.nc D3_S3.nc D3_S4.nc D4_'.nc D4_S2.nc D4_S3.nc D4_S4.nc D5_'.nc D5_S2.nc D5_S3.nc D5_S4.nc D6_'.nc D6_S2.nc D6_S3.nc D6_S4.nc D7_'.nc D7_S2.nc D7_S3.nc D7_S4.nc D8_'.nc D8_S2.nc D8_S3.nc D8_S4.nc D9_'.nc D9_S2.nc D9_S3.nc D9_S4.nc D10_'.nc D10_S2.nc D10_S3.nc D10_S4.nc D11_'.nc D11_S2.nc D11_S3.nc D11_S4.nc D12_'.nc D12_S2.nc D12_S3.nc D12_S4.nc D13_'.nc D13_S2.nc D13_S3.nc D13_S4.nc D14_'.nc D14_S2.nc D14_S3.nc D14_S4.nc D15_'.nc D15_S2.nc D15_S3.nc D15_S4.nc

## Polygon pours and split planes (outlines as drawn)
5V on Top Layer "5V_L01_P025" (solid, pour order 25): 172.15,96.75 172.5,96.4 182.6,86.3 185.9,89.6 173.9,100.4
GND on Top Layer "NONET_L01_P024" (solid, remove dead copper, shelved, pour order 24): 152 vertices, not listed, extent 56.328,25.644 244.103,213.421
5V on Top Layer "5V_L01_P023" (solid, pour order 23): 125.3,66.8 125.3,64.4 124.6,64.4 123.5,63.3 123.5,54.7 121.7,54.7 115.4,48.4 115.4,41.4 113.4,41.4 113.4,49.523 121.4,57.523 121.4,63.9 122.2,64.7 122.2,75.7 125.4,78.9 125.3,79 125.3,120.5 126.2,121.4 126.2,141.8 128.2,143.8 128.2,154.2 130.3,154.2 130.3,143.6 129.2,142.5 129.2,120.9 128.2,119.9 128.2,78.8 125.3,75.9
5V on Top Layer "5V_L01_P021" (solid, pour order 21): 149,69.4 151.6,69.4 151.6,42.1 151.7,42 148.8,42 148.8,69.5
5V on Top Layer "5V_L01_P020" (solid, pour order 20): 148.7,69.3 152.7,69.3 152.7,73.5 151.2,75 151.2,81.3 149.2,81.3 149.2,72.2 148.7,71.7
5V on Top Layer "5V_L01_P018" (solid, pour order 18): 180,90.5 174.5,85 174.5,64 179.5,59 179.5,50.5 183,47 183,50 181.5,51.5 181.5,60 177.5,64 177.5,81.2 182.833,86.533
5V on Top Layer "5V_L01_P016" (solid, pour order 16): 145.5,194.5 146.5,194.5 146.5,192 145.5,192
5V on Top Layer "5V_L01_P014" (solid, pour order 14): 149.1,182.2 149.1,180.5 145.5,184.1 145.5,185.8
5V on Top Layer "5V_L01_P012" (solid, pour order 12): 170.1,177.398 170.1,175.1 150.8,175.1 150.8,176.759
5V on Top Layer "5V_L01_P009" (solid, pour order 9): 169,164 172.5,164 173,163.5 173,162 169.5,162 169,162.5
5V on Top Layer "5V_L01_P008" (solid, pour order 8): 169,158.5 169,164 170.5,164 170.6,163.9 170.6,157.3
5V on Top Layer "5V_L01_P006" (solid, pour order 6): 171.6,103.3 171.3,103 153,103 153,100.5 171.478,100.5
5V on Top Layer "5V_L01_P004" (solid, pour order 4): 169.2,151.7 169.2,99.7 172.15,96.75 174.2,98.8 174.2,151.7
5V on Top Layer "5V_L01_P003" (solid, pour order 3): 172.15,96.75 172.5,96.4 182.6,86.3 185.9,89.6 173.9,100.4
5V on Top Layer "5V_L01_P005" (solid, pour order 5): 169.2,151.7 167.321,157.488 166.857,158.157 167.49,158.79 169.11,158.79 171.4,156.5 171.4,154.1 174.2,151.7
GND on Bottom Layer "NONET_L02_P026" (solid, remove dead copper, shelved, pour order 26): 152 vertices, not listed, extent 56.328,25.644 244.103,213.421
5V on Bottom Layer "5V_L02_P022" (solid, pour order 22): 148.8,61.5 151.4,61.5 151.4,58.9 134.5,58.9 132.4,61 132.4,63.2 131.2,64.4 122.1,64.4 122.1,66.8 126.8,66.8 127.2,66.4 132.6,66.4 134.6,64.4 134.75,61.95 135.363,61.337
5V on Bottom Layer "5V_L02_P019" (solid, pour order 19): 174.5,80.5 177.5,80.5 177.5,76.2 167.7,76.2 160.7,69.2 148.1,69.2 148.1,72.1 158.3,72.1 166.5,80.3 166.6,80.3
5V on Bottom Layer "5V_L02_P015" (solid, pour order 15): 145.6,194.45 145.6,184.5 146.8,184.5 146.8,194.45
5V on Bottom Layer "5V_L02_P013" (solid, pour order 13): 154.5,175.1 147.7,175.1 147.7,181.8 144.85,184.65 146.75,186.55 151.8,181.5 151.8,176.9 154.5,176.9
5V on Bottom Layer "5V_L02_P011" (solid, pour order 11): 169.682,163.438 170.82,162.3 170.82,162 173.2,162 177.6,166.4 177.6,175.18 175.48,177.3 166.62,177.3 166.62,175.2 174.4,175.2 175.52,174.08 175.52,167.5 172.02,164 170.02,164

## Keep-outs
Keep-Out Layer:
  the board outline again, w0.1

## Other copper
Top Layer:
  text "Designed by / Geo & Stoffe @ ETF" at 222.018,108.7 h3 r90
  text "SPI / Connector" at 193.7,103.5 h3
  text "Power input" at 194.569,89.373 h3
  text "5V" at 194.6,86.6 h3

## Silkscreen, mask and mechanical layers (free items; w line width, h text height)
Mechanical 3:
  drawing of 427 lines, arcs and shapes, not listed